# EAGLE board CT_schematic (EAGLE 7.6.0)

Size 100 x 80 mm. Coordinates in mm from the lower left corner, seen from the top.
Outline: 0,0 100,0 100,80 0,80 0,0
Copper layers (1*16): Top 0.035mm / dielectric 1.5mm / Bottom 0.035mm
Design rules "default": minimum track width 10mil, minimum drill 24mil, track to track 8mil, track to pad 8mil, pad to pad 8mil, via to via 8mil, smd to smd 8mil, copper to edge 40mil, drill to drill 8mil, minimum pad ring 10mil, minimum via ring 8mil, stop-mask expansion 4mil, vias tented up to drill 0mil, thermal gap 10mil

## Footprints (pad centres in the part's own frame; a part is rotated, then mirrored left to right if it is on the bottom)
C0603 = smd 0.8 x 0.8: 1 -0.762,0; 2 0.762,0
C0402 = smd 0.5 x 0.5: 1 -0.508,0; 2 0.508,0
EXV-9B = smd 2.718 x 1.778: 1 -2.108,0; 2 2.108,0
EXV-9H = smd 3.505 x 1.676: 1 -2.857,0; 2 2.857,0
L0603 = smd 0.8 x 0.8: 1 -0.762,0; 2 0.762,0
PJ-037B_PACKAGE = drill 3.7 square: 1 12,0 | drill 3.2 square: 2 6,0
R0603 = smd 0.8 x 0.8: 1 -0.762,0; 2 0.762,0
LQFP100 = smd 0.3 x 1.2: 1 -6,-7.75; 2 -5.5,-7.75; 3 -5,-7.75; 4 -4.5,-7.75; 5 -4,-7.75; 6 -3.5,-7.75; 7 -3,-7.75; 8 -2.5,-7.75; 9 -2,-7.75; 10 -1.5,-7.75; 11 -1,-7.75; 12 -0.5,-7.75; 13 0,-7.75; 14 0.5,-7.75; 15 1,-7.75; 16 1.5,-7.75; 17 2,-7.75; 18 2.5,-7.75; 19 3,-7.75; 20 3.5,-7.75; 21 4,-7.75; 22 4.5,-7.75; 23 5,-7.75; 24 5.5,-7.75; 25 6,-7.75; 51 6,7.75; 52 5.5,7.75; 53 5,7.75; 54 4.5,7.75; 55 4,7.75; 56 3.5,7.75; 57 3,7.75; 58 2.5,7.75; 59 2,7.75; 60 1.5,7.75; 61 1,7.75; 62 0.5,7.75; 63 0,7.75; 64 -0.5,7.75; 65 -1,7.75; 66 -1.5,7.75; 67 -2,7.75; 68 -2.5,7.75; 69 -3,7.75; 70 -3.5,7.75; 71 -4,7.75; 72 -4.5,7.75; 73 -5,7.75; 74 -5.5,7.75; 75 -6,7.75 | smd 1.2 x 0.3: 26 7.75,-6; 27 7.75,-5.5; 28 7.75,-5; 29 7.75,-4.5; 30 7.75,-4; 31 7.75,-3.5; 32 7.75,-3; 33 7.75,-2.5; 34 7.75,-2; 35 7.75,-1.5; 36 7.75,-1; 37 7.75,-0.5; 38 7.75,0; 39 7.75,0.5; 40 7.75,1; 41 7.75,1.5; 42 7.75,2; 43 7.75,2.5; 44 7.75,3; 45 7.75,3.5; 46 7.75,4; 47 7.75,4.5; 48 7.75,5; 49 7.75,5.5; 50 7.75,6; 76 -7.75,6; 77 -7.75,5.5; 78 -7.75,5; 79 -7.75,4.5; 80 -7.75,4; 81 -7.75,3.5; 82 -7.75,3; 83 -7.75,2.5; 84 -7.75,2; 85 -7.75,1.5; 86 -7.75,1; 87 -7.75,0.5; 88 -7.75,0; 89 -7.75,-0.5; 90 -7.75,-1; 91 -7.75,-1.5; 92 -7.75,-2; 93 -7.75,-2.5; 94 -7.75,-3; 95 -7.75,-3.5; 96 -7.75,-4; 97 -7.75,-4.5; 98 -7.75,-5; 99 -7.75,-5.5; 100 -7.75,-6
AT24C02D = smd 1.6 x 0.6: 1 -2.475,1.905 | smd 1.55 x 0.6: 2 -2.475,0.635; 3 -2.475,-0.635; 4 -2.475,-1.905; 5 2.475,-1.905; 6 2.475,-0.635; 7 2.475,0.635; 8 2.475,1.905
ABS07-32.768KHZ-7-T = smd 1.1 x 2.4: 1 -2.5,0; 2 0,0
ABLS-25.000MHZ-B2F-T = smd 5.6 x 2.8: 1 -3.81,0; 2 5.69,0
LP2954 = smd 1.6 x 0.6: 1 -2.475,1.905 | smd 1.55 x 0.6: 2 -2.475,0.635; 3 -2.475,-0.635; 4 -2.475,-1.905; 5 2.475,-1.905; 6 2.475,-0.635; 7 2.475,0.635; 8 2.475,1.905
SON-6 = smd 0.55 x 0.3: 1 -0.355,0.5 | smd 0.52 x 0.3: 2 -0.37,0; 3 -0.37,-0.5; 4 0.37,-0.5; 5 0.37,0; 6 0.37,0.5
SW_4-1437565-2 = smd 1.4 x 2.1: 1 -2.23,4.55; 2 -2.23,-4.55; 3 2.23,4.55; 4 2.23,-4.55
LGM67K-G1J2-24-Z = smd 0.8 x 1.4: A -2,0; C 0,0
NC7SZ125M5X = smd 1.3 x 0.7: 1 -1.3,0.95; 2 -1.3,0; 3 -1.3,-0.95; 4 1.3,-0.95; 5 1.3,0.95

## Placement (x,y rotation side)
C1  1e-07  [C0603]  -27.94,63.5 0 top  (outside the outline)
C2  1e-07  [C0603]  -31.75,63.5 0 top  (outside the outline)
C3  1e-07  [C0603]  -35.56,63.5 0 top  (outside the outline)
C4  1e-07  [C0603]  -39.37,63.5 0 top  (outside the outline)
C5  1e-07  [C0603]  -43.18,63.5 0 top  (outside the outline)
C6  4.7e-06  [C0603]  -24.13,63.5 0 top  (outside the outline)
C7  1e-07  [C0603]  -46.99,63.5 0 top  (outside the outline)
C8  1e-08  [C0603]  -50.8,63.5 0 top  (outside the outline)
C9  1e-06  [C0603]  -54.61,63.5 0 top  (outside the outline)
C10  1e-11  [C0402]  -30.48,68.58 0 top  (outside the outline)
C11  1e-11  [C0402]  -34.29,68.58 0 top  (outside the outline)
C12  1e-11  [C0402]  -38.1,68.58 0 top  (outside the outline)
C13  1e-11  [C0402]  -41.91,68.58 0 top  (outside the outline)
C14  1e-08  [C0402]  -45.72,68.58 0 top  (outside the outline)
C15  1e-06  [EXV-9B]  -30.48,50.8 0 top  (outside the outline)
C16  2.2e-06  [EXV-9B]  -39.37,50.8 0 top  (outside the outline)
C17  1e-07  [C0402]  -49.53,68.58 0 top  (outside the outline)
C18  0.0001  [EXV-9H]  -35.56,34.29 0 top  (outside the outline)
C19  0.0001  [EXV-9H]  -46.99,34.29 0 top  (outside the outline)
C20  1e-08  [C0402]  -53.34,68.58 0 top  (outside the outline)
F1  240.0  [L0603]  -58.42,63.5 0 top  (outside the outline)
J1  PJ-037B  [PJ-037B_PACKAGE]  -49.53,7.62 0 top  (outside the outline)
R2  1000.0  [R0603]  -15.24,68.58 0 top  (outside the outline)
R4  4700.0  [R0603]  -19.05,68.58 0 top  (outside the outline)
R5  2200.0  [R0603]  -22.86,68.58 0 top  (outside the outline)
R6  2200.0  [R0603]  -26.67,68.58 0 top  (outside the outline)
R7  10000.0  [R0603]  -30.48,58.42 0 top  (outside the outline)
R8  10000.0  [R0603]  -35.56,58.42 0 top  (outside the outline)
R9  10000.0  [R0603]  -40.64,58.42 0 top  (outside the outline)
R10  10000.0  [R0603]  -45.72,58.42 0 top  (outside the outline)
R11  10000.0  [R0603]  -50.8,58.42 0 top  (outside the outline)
R12  100000.0  [R0603]  -53.34,50.8 0 top  (outside the outline)
R13  100000.0  [R0603]  -58.42,50.8 0 top  (outside the outline)
R14  47000.0  [R0603]  -55.88,58.42 0 top  (outside the outline)
R15  100000.0  [R0603]  -15.24,58.42 0 top  (outside the outline)
R16  10000.0  [R0603]  -60.96,58.42 0 top  (outside the outline)
R17  10000.0  [R0603]  -15.24,63.5 0 top  (outside the outline)
R18  82000.0  [R0603]  -20.32,63.5 0 top  (outside the outline)
R19  300000.0  [R0603]  -20.32,58.42 0 top  (outside the outline)
R20  120000.0  [R0603]  -25.4,58.42 0 top  (outside the outline)
U1  STM32L152VDT6X  [LQFP100]  -25.4,8.89 0 top  (outside the outline)
U2  AT24C02D-SSHM-T  [AT24C02D]  -44.45,22.86 0 top  (outside the outline)
U3  ABS07-32.768KHZ-7-T  [ABS07-32.768KHZ-7-T]  -49.53,44.45 0 top  (outside the outline)
U4  ABLS-25.000MHZ-B2F-T  [ABLS-25.000MHZ-B2F-T]  -26.67,44.45 0 top  (outside the outline)
U5  LP2954AIMX/NOPB  [LP2954]  -25.4,35.56 0 top  (outside the outline)
U6  TPS3895ADRYR  [SON-6]  -55.88,67.31 0 top  (outside the outline)
U7  4-1437565-2  [SW_4-1437565-2]  -27.94,24.13 0 top  (outside the outline)
U8  Q65110A2395  [LGM67K-G1J2-24-Z]  -17.78,52.07 0 top  (outside the outline)
U9  nc7sz125m5x  [NC7SZ125M5X]  -46.99,50.8 0 top  (outside the outline)

## Library data of the parts
C1-C20 F1 J1 R2 R4-R20 U1-U9 = circuit_tree

## Nets
CLK_CRYSTAL_U1_8: C10.1 U1.8 U3.1
CLK_CRYSTAL_U1_9: C11.1 U1.9 U3.2
CLK_CRYSTAL_U1_12: C12.1 U1.12 U4.1
CLK_CRYSTAL_U1_13: C13.1 U1.13 U4.2
GND: C1.2 C2.2 C3.2 C4.2 C5.2 C6.2 C7.2 C8.2 C9.2 C10.2 C11.2 C12.2 C13.2 C14.2 C15.2 C16.2 C17.2 C18.2 C19.2 C20.2 J1.2 R2.2 R7.2 R8.2 R10.2 R11.2 R15.2 R18.2 R20.2 U1.10 U1.19 U1.20 U1.27 U1.49 U1.74 U1.99 U2.4 U5.4 U6.2 U8.C U9.1 U9.3
NET_U1_6: C7.1 U1.6
NET_U1_14: R4.1 U1.14 U9.4
NET_U1_22: C8.1 C9.1 F1.1 U1.21 U1.22
NET_U1_92: R5.1 U1.92 U2.6
NET_U1_93: R6.1 U1.93 U2.5
NET_U1_94: R7.1 U1.94
NET_U1_97: U8.A
NET_U1_98: U7.3 U7.4
NET_U2_1: R9.1 U2.1
NET_U2_2: R10.1 U2.2
NET_U2_3: R11.1 U2.3
NET_U2_7: R8.1 U2.7
NET_U5_3: R13.1 U5.3
NET_U5_5: R12.1 U5.5
NET_U5_7: R14.2 R15.1 U5.7
NET_U6_1: R17.1 R18.1 U6.1
NET_U6_3: R19.2 R20.1 U6.3
NET_U6_4: R16.1 U6.4 U9.2
NET_U7_1: R2.1 U7.1 U7.2
VCC_S1_12V3: C15.1 C18.1 C19.1 J1.1 R13.2 U5.8
VCC_TIER1_1V8: C1.1 C2.1 C3.1 C4.1 C5.1 C6.1 C14.1 C16.1 C17.1 C20.1 F1.2 R4.2 R5.2 R6.2 R9.2 R12.2 R14.1 R16.2 R17.2 R19.1 U1.11 U1.28 U1.50 U1.75 U1.100 U2.8 U5.1 U6.6 U9.5

## Tracks (layer width: path | path; a pad name or v marks a point on that pad's centre or on a via)
CLK_CRYSTAL_U1_8  (2 unrouted)
CLK_CRYSTAL_U1_9  (2 unrouted)
CLK_CRYSTAL_U1_12  (2 unrouted)
CLK_CRYSTAL_U1_13  (2 unrouted)
GND  (41 unrouted)
NET_U1_6  (1 unrouted)
NET_U1_14  (2 unrouted)
NET_U1_22  (4 unrouted)
NET_U1_92  (2 unrouted)
NET_U1_93  (2 unrouted)
NET_U1_94  (1 unrouted)
NET_U1_98  (1 unrouted)
NET_U2_1  (1 unrouted)
NET_U2_2  (1 unrouted)
NET_U2_3  (1 unrouted)
NET_U2_7  (1 unrouted)
NET_U5_3  (1 unrouted)
NET_U5_5  (1 unrouted)
NET_U5_7  (2 unrouted)
NET_U6_1  (2 unrouted)
NET_U6_3  (2 unrouted)
NET_U6_4  (2 unrouted)
NET_U7_1  (2 unrouted)
VCC_S1_12V3  (5 unrouted)
VCC_TIER1_1V8  (28 unrouted)